# Altium PCB STM_System_Board.PCBDOC (part 11 of 16)
Units mm, origin at the board's own origin, x right, y up, seen from the top; angles counter-clockwise.
Board outline 222.53 x 100.01 mm, 6 copper layers (Top Layer, Int1 (GND), Int2 (Sign), Layer 1, Layer 2, Bottom Layer), stack 1.526 mm thick; 702 components, 774 nets, 3596 pads, 1988 vias.
Unrouted connection lines stored in the file: 1.
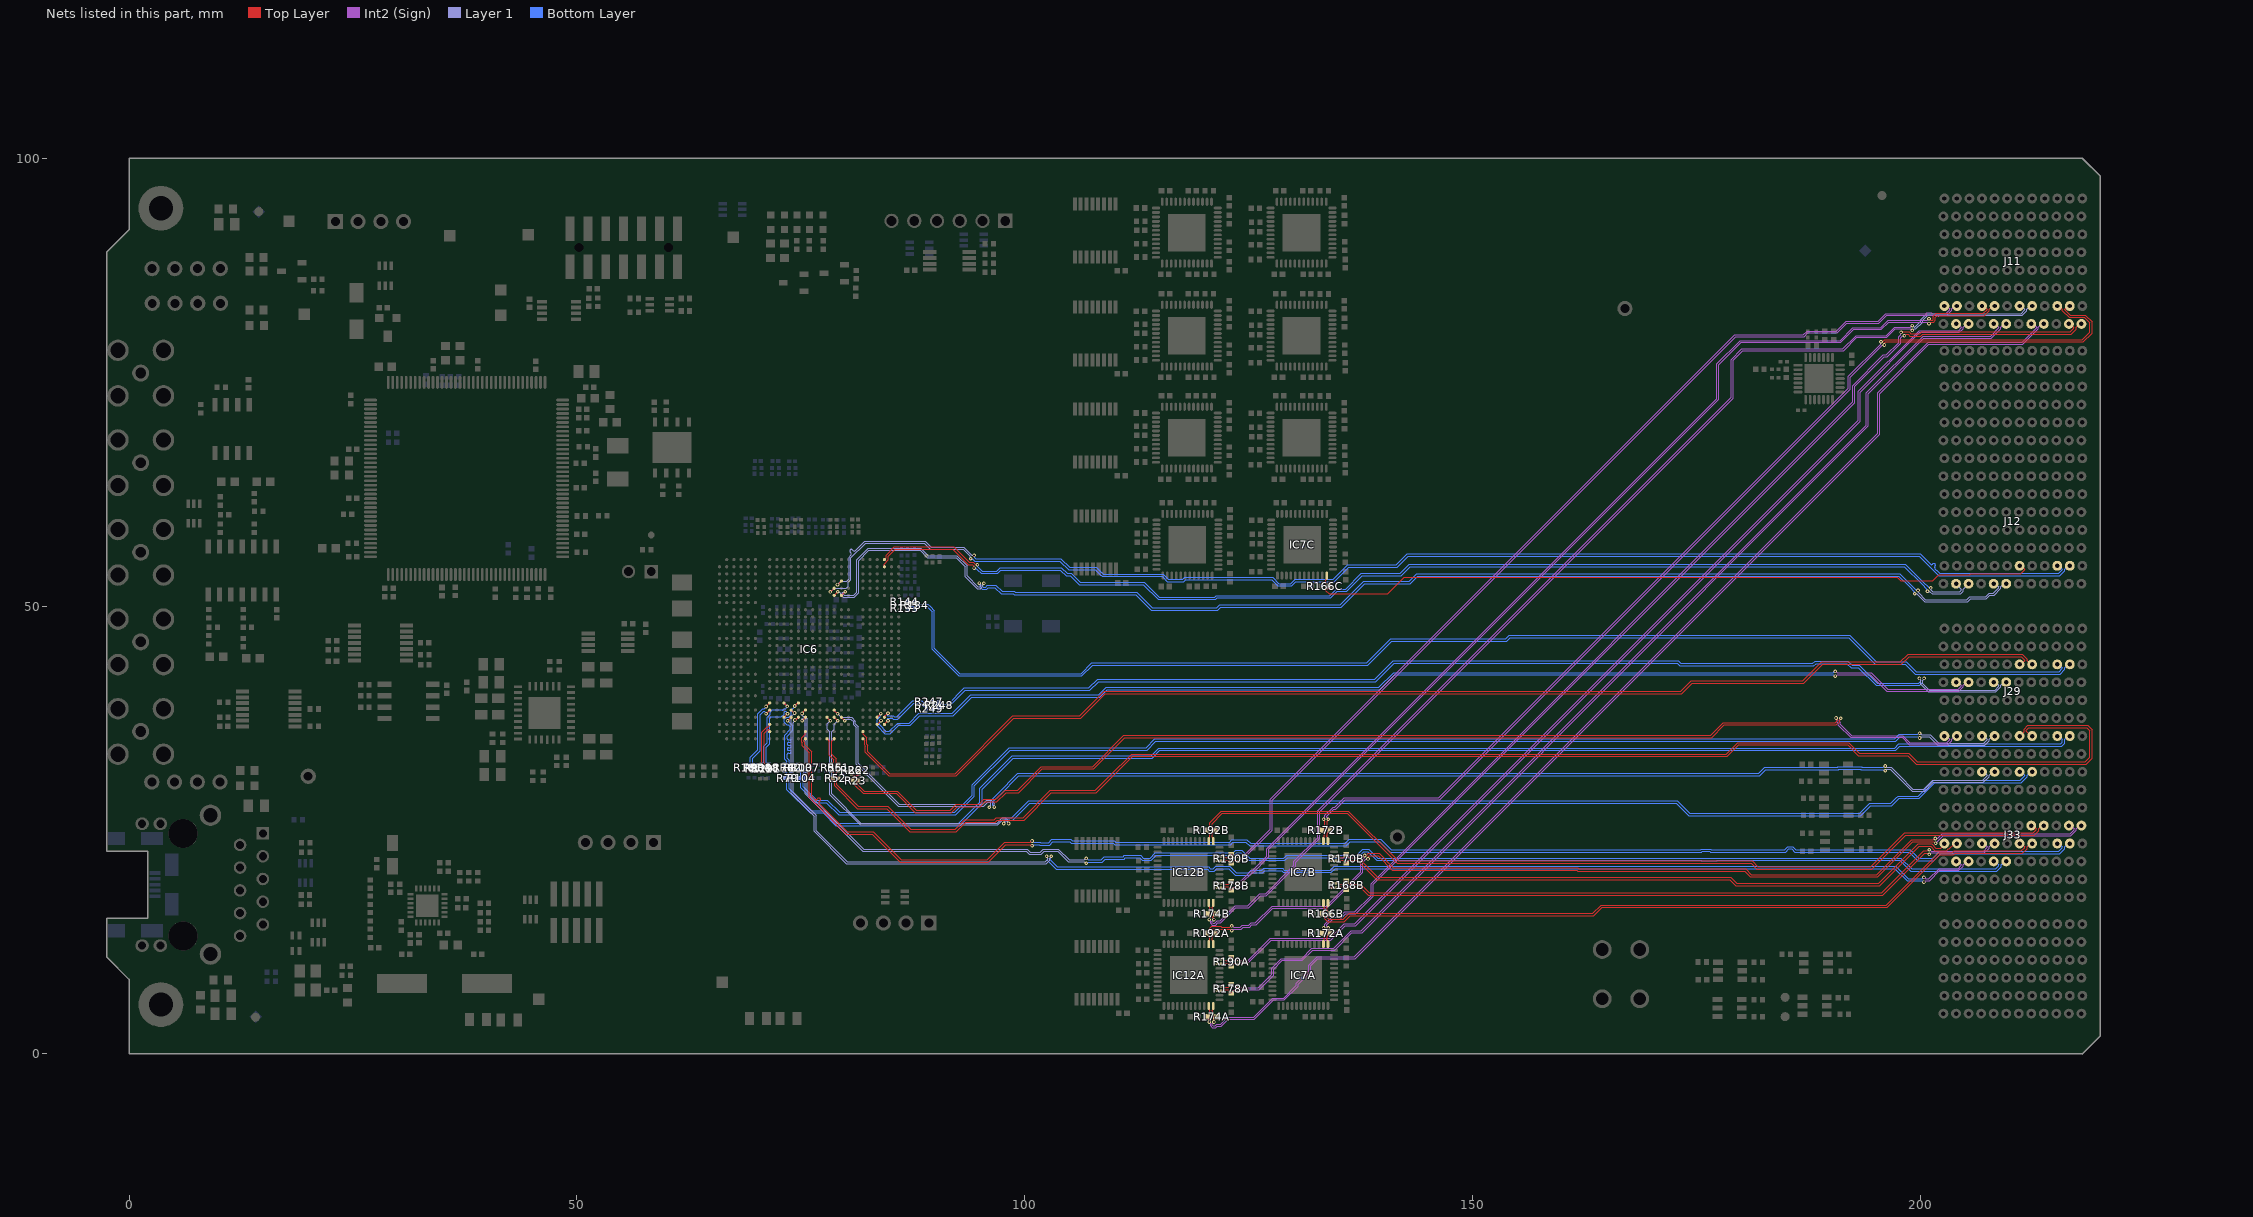
[diagram p14: the nets of this part, all layers, seen from the top]

## Via types
v1: diameter 0.4, hole 0.2, Top Layer to Bottom Layer, tented both sides, 1806 vias
v2: diameter 0.7, hole 0.4, Top Layer to Bottom Layer, tented both sides, 92 vias
v3: diameter 0.7, hole 0.4, Top Layer to Bottom Layer, 90 vias

## Nets (pads, with @x,y where several pads share a name; then routed paths per layer and width w, separated by ;. In a path a pad name is that pad's centre, name@x,y a point inside that pad or via, vN(x,y) a via of type N, cw(c..) or ccw(c..) an arc to the next point about the centre after c; other vN are vias at no path point) (continued)
SLOT1.LVDS_11_N: IC7A.14 J11.B1 R172A.2 | length 117.1
  Top Layer w0.095: IC7A.14@133.325,12.256 133.325,12.598 133.442,12.715 133.442,12.959 133.468,12.986 133.468,13.141 133.412,13.196 133.374,13.196 133.131,13.439 R172A.2@133.131,13.459 133.338,13.665 v1(133.338,14.062) ; v1(197.802,80.548) 197.846,80.592 198.704,80.592 198.899,80.397 199.885,80.397 200.088,80.6 216.673,80.6 217.105,81.032 217.105,81.111 216.726,81.49 J11.B1@216.539,81.49
  Int2 (Sign) w0.102: v1(133.338,14.062) 133.338,14.114 133.495,14.271 133.495,14.493 134.266,15.264 135.1,15.264 135.705,15.869 136.846,15.869 138.65,17.672 138.65,19.014 192.411,72.775 192.411,74.611 195.84,78.04 196.163,78.04 197.538,79.416 197.538,80.062 197.765,80.289 197.765,80.511 v1(197.802,80.548)
SLOT1.LVDS_11_P: IC7A.13 J11.A1 R172A.1 | length 117
  Top Layer w0.095: IC7A.13@133.825,12.256 133.825,12.612 133.708,12.729 133.708,12.849 133.735,12.875 133.735,13.141 133.791,13.196 133.829,13.196 134.071,13.439 R172A.1@134.071,13.459 133.865,13.665 v1(133.865,14.062) ; v1(198.175,80.175) 198.25,80.175 198.4,80.325 198.593,80.325 198.788,80.13 199.995,80.13 200.199,80.333 216.784,80.333 217.372,80.921 217.372,81.111 217.752,81.49 J11.A1@217.939,81.49
  Int2 (Sign) w0.102: v1(133.865,14.062) 133.865,14.114 133.708,14.271 133.708,14.404 134.355,15.05 135.189,15.05 135.793,15.655 136.935,15.655 138.864,17.584 138.864,18.925 192.625,72.686 192.625,74.522 195.929,77.826 196.251,77.826 197.752,79.327 197.752,79.974 197.917,80.138 198.138,80.138 v1(198.175,80.175)
SLOT1.LVDS_12_N: IC12A.48 J11.E1 R174A.2 | length 130.8
  Top Layer w0.095: IC12A.48@121.025,5.356 121.025,5.015 120.908,4.898 120.908,4.769 120.968,4.708 120.968,4.464 121.024,4.408 121.063,4.408 121.305,4.165 R174A.2@121.305,4.145 121.099,3.939 v1(121.099,3.565)
  Int2 (Sign) w0.102: v1(121.099,3.565) 121.099,3.513 120.942,3.357 120.942,3.224 121.002,3.164 121.238,3.164 121.399,3.325 121.85,3.325 122.613,4.088 125.538,4.088 127.693,6.243 128.876,6.243 130.305,7.673 130.305,7.894 131.689,9.278 131.689,9.914 132.627,10.851 136.776,10.851 195.211,69.286 195.211,73.811 200.832,79.432 211.31,79.432 212.932,81.054 212.932,81.138 212.58,81.49 J11.E1@212.339,81.49
SLOT1.LVDS_12_P: IC12A.47 J11.D1 R174A.1 | length 131.5
  Top Layer w0.095: IC12A.47@120.525,5.356 120.525,5.015 120.642,4.898 120.642,4.658 120.702,4.598 120.702,4.464 120.646,4.408 120.608,4.408 120.365,4.165 R174A.1@120.365,4.145 120.572,3.939 v1(120.572,3.565)
  Int2 (Sign) w0.102: v1(120.572,3.565) 120.572,3.513 120.728,3.357 120.728,3.135 120.913,2.95 121.327,2.95 121.488,3.111 121.939,3.111 122.702,3.874 125.627,3.874 127.782,6.03 128.964,6.03 130.519,7.585 130.519,7.805 131.903,9.189 131.903,9.825 132.716,10.637 136.865,10.637 195.425,69.197 195.425,73.722 200.92,79.218 211.398,79.218 213.146,80.965 213.146,81.138 213.498,81.49 J11.D1@213.739,81.49
SLOT1.LVDS_13_N: IC12A.4 J11.H1 R178A.2 | length 121.4
  Top Layer w0.095: IC12A.4@121.725,7.556 122.067,7.556 122.183,7.44 122.428,7.44 122.448,7.42 122.71,7.42 122.766,7.475 122.766,7.514 123.008,7.756 R178A.2@123.028,7.756 123.048,7.756 123.291,7.514 123.291,7.475 123.347,7.42 123.642,7.42 123.772,7.55 v1(123.85,7.55)
  Int2 (Sign) w0.102: v1(123.85,7.55) 123.902,7.55 124.059,7.393 126.068,7.393 127.55,8.875 127.55,9.564 128.638,10.651 130.881,10.651 132.029,11.8 134.475,11.8 136.414,13.739 137.564,13.739 157.644,33.819 157.644,33.894 193.936,70.186 193.936,73.786 200.264,80.114 207.792,80.114 208.732,81.054 208.732,81.138 208.38,81.49 J11.H1@208.139,81.49
SLOT1.LVDS_13_P: IC12A.3 J11.G1 R178A.1 | length 121.8
  Top Layer w0.095: IC12A.3@121.725,7.056 122.067,7.056 122.183,7.173 122.317,7.173 122.338,7.153 122.71,7.153 122.766,7.097 122.766,7.059 123.008,6.816 R178A.1@123.028,6.816 123.048,6.816 123.291,7.059 123.291,7.097 123.347,7.153 123.642,7.153 123.772,7.023 v1(123.85,7.023)
  Int2 (Sign) w0.102: v1(123.85,7.023) 123.902,7.023 124.059,7.179 126.157,7.179 127.764,8.786 127.764,9.475 128.726,10.437 130.969,10.437 132.118,11.586 134.564,11.586 136.503,13.525 137.653,13.525 157.858,33.73 157.858,33.805 194.15,70.097 194.15,73.697 200.353,79.9 207.881,79.9 208.946,80.965 208.946,81.138 209.298,81.49 J11.G1@209.539,81.49
SLOT1.LVDS_14_N: IC12A.10 J11.K1 R190A.2 | length 115.3
  Top Layer w0.095: IC12A.10@121.725,10.556 122.067,10.556 122.183,10.44 122.428,10.44 122.461,10.407 122.71,10.407 122.766,10.463 122.766,10.501 123.008,10.744 R190A.2@123.028,10.744 123.048,10.744 123.291,10.501 123.291,10.463 123.346,10.407 123.617,10.407 123.747,10.537 v1(123.825,10.537)
  Int2 (Sign) w0.102: v1(123.825,10.537) 123.877,10.537 124.034,10.381 124.856,10.381 127.389,12.914 134.039,12.914 135.664,14.539 136.839,14.539 193.025,70.725 193.025,73.95 199.825,80.75 204.228,80.75 204.532,81.054 204.532,81.138 204.18,81.49 J11.K1@203.939,81.49
SLOT1.LVDS_14_P: IC12A.9 J11.J1 R190A.1 | length 115.7
  Top Layer w0.095: IC12A.9@121.725,10.056 122.067,10.056 122.183,10.173 122.317,10.173 122.35,10.14 122.71,10.14 122.766,10.085 122.766,10.046 123.008,9.804 R190A.1@123.028,9.804 123.048,9.804 123.291,10.046 123.291,10.085 123.346,10.14 123.617,10.14 123.747,10.01 v1(123.825,10.01)
  Int2 (Sign) w0.102: v1(123.825,10.01) 123.877,10.01 124.034,10.167 124.944,10.167 127.478,12.7 134.128,12.7 135.753,14.325 136.928,14.325 193.239,70.636 193.239,73.861 199.914,80.536 204.317,80.536 204.746,80.965 204.746,81.138 205.098,81.49 J11.J1@205.339,81.49
SLOT1.LVDS_15_N: IC12A.14 J33.B5 R192A.2 | length 107
  Top Layer w0.095: IC12A.14@120.525,12.256 120.525,12.598 120.642,12.715 120.642,12.959 120.645,12.963 120.645,13.163 120.589,13.218 120.551,13.218 120.308,13.461 R192A.2@120.308,13.481 120.308,13.501 120.551,13.743 120.589,13.743 120.645,13.799 120.645,14.044 120.857,14.256 121.876,14.256 121.968,14.164 122.887,14.164 123.017,14.294 v1(123.1,14.294) ; v1(137.927,22.148) 137.983,22.203 138.167,22.203 138.34,22.376 139.535,22.376 141.119,20.792 161.708,20.792 161.833,20.667 180.45,20.667 181.092,20.025 195.075,20.025 198.982,23.932 201.424,23.932 201.542,24.051 v1(201.625,24.051)
  Int2 (Sign) w0.102: v1(123.1,14.294) 123.152,14.294 123.309,14.137 124.051,14.137 124.281,14.367 124.992,14.367 125.25,14.625 125.722,14.625 127.597,16.5 133.622,16.5 137.475,20.353 137.475,21.474 137.89,21.889 137.89,22.111 v1(137.927,22.148) ; v1(201.625,24.051) 201.651,24.077 201.894,24.077 202.406,24.589 216.667,24.589 217.132,25.054 217.132,25.138 216.78,25.49 J33.B5@216.539,25.49
SLOT1.LVDS_15_P: IC12A.13 J33.A5 R192A.1 | length 107
  Top Layer w0.095: IC12A.13@121.025,12.256 121.025,12.598 120.908,12.715 120.908,12.849 120.912,12.852 120.912,13.163 120.968,13.218 121.006,13.218 121.248,13.461 R192A.1@121.248,13.481 121.248,13.501 121.006,13.743 120.968,13.743 120.912,13.799 120.912,13.933 120.968,13.989 121.765,13.989 121.857,13.897 122.887,13.897 123.017,13.767 v1(123.1,13.767) ; v1(138.3,21.775) 138.355,21.83 138.355,22.014 138.45,22.109 139.425,22.109 141.009,20.525 161.598,20.525 161.723,20.4 180.339,20.4 180.981,19.758 195.186,19.758 199.093,23.665 201.444,23.665 201.585,23.525 v1(201.664,23.525)
  Int2 (Sign) w0.102: v1(123.1,13.767) 123.152,13.767 123.309,13.923 124.14,13.923 124.369,14.153 125.08,14.153 125.339,14.411 125.811,14.411 127.686,16.286 133.711,16.286 137.689,20.264 137.689,21.385 138.042,21.738 138.263,21.738 v1(138.3,21.775) ; v1(201.664,23.525) 201.664,23.544 202.495,24.375 216.756,24.375 217.346,24.965 217.346,25.138 217.698,25.49 J33.A5@217.939,25.49
SLOT1.LVDSr0_N: IC6.W21 R101.1 | length 8
  Top Layer w0.095: v1(71.115,38.784) IC6.W21@71.515,39.184
  Bottom Layer w0.095: R101.1@69.099,32.269 69.099,32.289 69.261,32.451 69.291,32.451 69.346,32.507 69.346,33.117 70.196,33.967 70.196,37.972 70.741,38.517 70.931,38.517 71.115,38.702 v1(71.115,38.784)
SLOT1.LVDSr0_P: IC6.W22 R90.1 | length 7.6
  Top Layer w0.095: v1(71.115,37.984) IC6.W22@71.515,38.384
  Bottom Layer w0.095: R90.1@69.861,32.269 69.861,32.289 69.698,32.451 69.669,32.451 69.613,32.507 69.613,33.007 70.463,33.856 70.463,37.862 70.852,38.251 70.931,38.251 71.115,38.066 v1(71.115,37.984)
SLOT1.LVDSr1_N: IC6.W24 R129.1 | length 5.2
  Top Layer w0.095: R129.1@70.387,32.192 70.387,32.212 70.55,32.375 70.579,32.375 70.635,32.43 70.635,35.93 71.222,36.517 71.411,36.517 71.467,36.573 71.467,36.736 IC6.W24@71.515,36.784
SLOT1.LVDSr1_P: IC6.W25 R121.1 | length 4.7
  Top Layer w0.095: R121.1@71.149,32.192 71.149,32.212 70.987,32.375 70.957,32.375 70.902,32.43 70.902,35.82 71.333,36.251 71.411,36.251 71.467,36.195 71.467,36.032 IC6.W25@71.515,35.984
SLOT1.LVDSr3_N: IC6.U23 R88.1 | length 8.7
  Top Layer w0.095: IC6.U23@73.115,37.59 v1(73.5,37.975)
  Bottom Layer w0.095: R88.1@71.389,32.279 71.389,32.299 71.227,32.461 71.183,32.461 71.127,32.517 71.127,34.226 71.535,34.633 71.535,37.253 71.535,37.497 71.68,37.642 71.759,37.642 71.786,37.615 72.82,37.615 73.116,37.912 73.116,38.138 73.232,38.254 73.311,38.254 73.367,38.198 73.367,38.191 73.5,38.058 v1(73.5,37.975)
SLOT1.LVDSr3_P: IC6.U21 R84.1 | length 9.1
  Top Layer w0.095: IC6.U21@73.115,39.184 73.115,39.16 v1(73.475,38.8)
  Bottom Layer w0.095: R84.1@70.596,32.285 70.596,32.305 70.759,32.467 70.805,32.467 70.861,32.523 70.861,34.336 71.268,34.743 71.268,37.364 71.268,37.607 71.566,37.906 71.566,38.145 71.821,38.399 72.855,38.399 72.888,38.366 72.967,38.366 73.122,38.521 73.311,38.521 73.385,38.595 73.385,38.628 73.475,38.717 v1(73.475,38.8)
SLOT2.LVDS_0_N: J29.C2 R79.1 R82.2 | length 151.7
  Bottom Layer w0.095: R79.1@73.88,30.795 R79.1@73.86,30.795 ; R82.2@73.94,31.597 73.94,31.577 73.778,31.415 73.739,31.415 73.683,31.359 73.683,31.013 73.697,30.999 73.697,30.958 R79.1@73.86,30.795 ; J29.C2@215.239,35.49 215.426,35.49 215.805,35.111 215.805,34.78 215.65,34.625 197.573,34.625 197.089,34.142 114.967,34.142 114.117,33.292 98.565,33.292 94.95,29.677 94.95,28.092 92.608,25.75 79.002,25.75 77.577,27.175 76.125,27.175 73.683,29.617 73.683,30.577 73.697,30.591 73.697,30.633 R79.1@73.86,30.795
SLOT2.LVDS_0_P: J29.B2 R74.2 R79.2 | length 152.6
  Bottom Layer w0.095: R74.2@73.153,31.622 73.153,31.602 73.315,31.44 73.352,31.44 73.416,31.376 73.416,31.013 73.402,30.999 73.402,30.958 R79.2@73.24,30.795 ; R79.2@73.22,30.795 R79.2@73.24,30.795 ; J29.B2@216.639,35.49 216.452,35.49 216.072,35.111 216.072,34.67 215.761,34.358 197.683,34.358 197.2,33.875 115.077,33.875 114.227,33.025 98.675,33.025 95.217,29.567 95.217,27.981 92.719,25.483 78.892,25.483 77.467,26.908 76.014,26.908 73.416,29.507 73.416,30.577 73.402,30.591 73.402,30.633 R79.2@73.24,30.795
SLOT2.LVDS_1_N: J29.F2 R52.1 R56.2 | length 162
  Top Layer w0.095: R56.2@78.423,31.624 78.423,31.604 78.585,31.442 78.628,31.442 78.683,31.386 78.683,31.087 78.703,31.068 78.703,30.922 R52.1@78.552,30.771 78.572,30.771 78.735,30.608 78.735,30.567 78.749,30.553 78.749,29.949 81.314,27.383 84.589,27.383 87.164,24.808 92.336,24.808 93.393,25.866 96.691,25.866 96.933,26.108 99.908,26.108 102.958,29.158 107.966,29.158 112.016,33.208 178.408,33.208 179.697,34.497 191.851,34.497 193.048,33.3 198.525,33.3 199.492,32.333 218.486,32.333 219.142,32.989 219.142,36.186 218.66,36.667 211.933,36.667 211.535,36.269 211.535,35.978 211.271,35.714 211.271,35.49 J29.F2@211.039,35.49
SLOT2.LVDS_1_P: J29.E2 R51.2 R52.2 | length 160.2
  Top Layer w0.095: R51.2@79.21,31.624 79.21,31.604 79.048,31.442 79.006,31.442 78.95,31.386 78.95,31.198 78.97,31.178 78.97,30.993 R52.2@79.192,30.771 ; R52.2@79.212,30.771 R52.2@79.192,30.771 ; J29.E2@212.439,35.49 212.36,35.49 211.802,36.048 211.802,36.158 212.043,36.4 218.55,36.4 218.875,36.075 218.875,33.1 218.375,32.6 199.602,32.6 198.636,33.567 193.158,33.567 191.961,34.764 179.586,34.764 178.298,33.475 111.906,33.475 109.465,31.035 107.856,29.425 102.848,29.425 99.798,26.375 96.823,26.375 96.581,26.133 93.283,26.133 92.225,25.075 87.275,25.075 84.7,27.65 81.425,27.65 79.016,30.059 79.016,30.553 79.03,30.567 79.03,30.608 R52.2@79.192,30.771
SLOT2.LVDS_2_N: IC6.L23 J33.F8 | length 149
  Top Layer w0.095: IC6.L23@77.89,37.584 v1(78.29,37.184)
  Layer 1 w0.102: v1(78.29,37.184) 77.937,36.831 77.937,36.228 78.158,36.006 78.165,36.006 78.225,35.947 78.225,35.596 78.225,28.947 81.611,25.561 96.988,25.561 97.553,26.126 97.747,26.126 97.807,26.067 97.807,25.934 97.65,25.777 v1(97.65,25.725)
  Bottom Layer w0.095: v1(97.65,25.725) 97.65,25.803 97.78,25.933 97.78,26.178 97.992,26.39 98.342,26.39 98.362,26.371 98.536,26.371 100.416,28.25 172.8,28.25 174.2,26.85 193.173,26.85 194.323,28 196.675,28 197.25,28.575 197.268,28.575 197.484,28.791 199.739,28.791 201.473,30.525 211.098,30.525 211.605,31.032 211.605,31.111 211.226,31.49 J33.F8@211.039,31.49
SLOT2.LVDS_2_P: IC6.K23 J33.E8 | length 149.1
  Top Layer w0.095: IC6.K23@78.715,37.584 v1(79.115,37.184)
  Layer 1 w0.102: v1(79.115,37.184) 78.737,36.806 78.737,36.272 78.439,35.974 78.439,35.685 78.439,29.036 81.7,25.775 96.899,25.775 97.464,26.34 97.836,26.34 98.02,26.155 98.02,25.934 98.177,25.777 v1(98.177,25.725)
  Bottom Layer w0.095: v1(98.177,25.725) 98.177,25.803 98.047,25.933 98.047,26.068 98.103,26.123 98.232,26.123 98.251,26.104 98.647,26.104 100.526,27.983 172.689,27.983 174.089,26.583 193.283,26.583 194.433,27.733 196.786,27.733 197.361,28.308 197.379,28.308 197.595,28.524 199.85,28.524 201.583,30.258 211.209,30.258 211.872,30.921 211.872,31.111 212.252,31.49 J33.E8@212.439,31.49
SLOT2.LVDS_3_N: J29.H5 R248.1 R249.2 | length 125.2
  Layer 1 w0.102: v1(200.375,41.925) 200.375,41.873 200.218,41.716 200.218,41.332 200.925,40.625 208.303,40.625 208.732,41.054 208.732,41.138 208.38,41.49 J29.H5@208.139,41.49
  Bottom Layer w0.095: R249.2@89.678,38.529 89.698,38.529 89.861,38.691 89.861,38.726 89.916,38.781 90.207,38.781 90.211,38.777 90.262,38.777 R248.1@90.425,38.615 ; R248.1@90.425,38.595 R248.1@90.425,38.615 ; v1(200.375,41.925) 200.375,41.847 200.245,41.717 200.245,41.472 199.906,41.133 195.014,41.133 193.039,43.108 192.242,43.108 191.767,43.583 188.311,43.583 188.052,43.325 173.087,43.325 172.804,43.608 141.208,43.608 139.175,41.575 108.252,41.575 107.261,40.583 93.354,40.583 91.563,38.792 90.643,38.792 90.629,38.777 90.587,38.777 R248.1@90.425,38.615
SLOT2.LVDS_3_P: J29.G5 R247.2 R248.2 | length 125.5
  Layer 1 w0.102: v1(199.848,41.925) 199.848,41.873 200.005,41.716 200.005,41.243 200.836,40.411 208.392,40.411 208.946,40.965 208.946,41.138 209.298,41.49 J29.G5@209.539,41.49
  Bottom Layer w0.095: R247.2@89.678,39.301 89.698,39.301 89.861,39.138 89.861,39.104 89.916,39.048 90.197,39.048 90.221,39.072 90.262,39.072 R248.2@90.425,39.235 ; R248.2@90.425,39.255 R248.2@90.425,39.235 ; v1(199.848,41.925) 199.848,41.847 199.978,41.717 199.978,41.583 199.796,41.4 195.125,41.4 193.15,43.375 192.352,43.375 191.877,43.85 188.2,43.85 187.942,43.592 173.198,43.592 172.914,43.875 141.098,43.875 139.064,41.842 108.142,41.842 107.15,40.85 93.244,40.85 91.452,39.058 90.643,39.058 90.629,39.072 90.587,39.072 R248.2@90.425,39.235
SLOT2.LVDS_4_N: IC6.D24 J29.K5 | length 126.8
  Top Layer w0.095: IC6.D24@83.515,36.784 83.515,36.789 v1(83.941,37.215)
  Int2 (Sign) w0.102: v1(190.45,42.707) 190.502,42.707 190.659,42.55 194.45,42.55 194.912,42.088 196.3,40.7 204.178,40.7 204.532,41.054 204.532,41.138 204.18,41.49 J29.K5@203.939,41.49
  Bottom Layer w0.095: v1(83.941,37.215) 83.941,37.167 83.781,37.007 83.781,36.727 84.482,36.026 84.88,36.026 85.796,36.942 87.092,36.942 88.167,38.017 91.892,38.017 93.95,40.075 108.223,40.075 109.064,40.917 139.489,40.917 141.149,42.576 190.242,42.576 190.372,42.707 v1(190.45,42.707)
SLOT2.LVDS_4_P: IC6.D23 J29.J5 | length 128.4
  Top Layer w0.095: IC6.D23@83.515,37.584 83.515,37.589 v1(83.916,37.99) v1@83.916,37.985
  Int2 (Sign) w0.102: v1(190.45,42.18) 190.502,42.18 190.659,42.336 194.361,42.336 194.824,41.874 196.211,40.486 204.267,40.486 204.746,40.965 204.746,41.138 205.098,41.49 J29.J5@205.339,41.49
  Bottom Layer w0.095: v1(83.916,37.99) 83.858,37.932 83.858,37.661 83.514,37.318 83.514,36.616 84.372,35.759 84.991,35.759 85.907,36.675 87.202,36.675 88.277,37.75 92.002,37.75 94.061,39.808 108.333,39.808 109.175,40.65 139.6,40.65 141.26,42.31 190.242,42.31 190.372,42.18 v1(190.45,42.18)
SLOT2.LVDS_5_N: IC6.P22 J33.H3 | length 149.6
  Top Layer w0.095: v1(75.125,38) 75.125,38.01 IC6.P22@75.51,38.395
  Layer 1 w0.102: v1(75.125,38) 75.174,37.951 75.174,37.779 75.234,37.719 75.406,37.719 75.707,37.419 75.707,29.143 81.986,22.864 100.239,22.864 100.576,22.526 101.726,22.526 102.064,22.864 103.736,22.864 104.934,21.666 106.641,21.666 106.798,21.822 v1(106.85,21.822)
  Bottom Layer w0.095: v1(106.85,21.822) 106.928,21.822 107.058,21.692 108.54,21.692 108.874,22.026 110.971,22.026 111.112,22.166 112.915,22.166 113.212,21.869 113.995,21.869 114.558,22.432 123.235,22.432 123.554,22.751 124.205,22.751 125.087,21.87 128.893,21.87 129.215,22.192 137.064,22.192 137.714,22.842 138.408,22.842 139.383,21.867 139.925,21.867 175.597,21.867 175.613,21.85 175.923,21.85 175.939,21.867 197.783,21.867 198.975,20.675 208.348,20.675 208.705,21.032 208.705,21.111 208.326,21.49 J33.H3@208.139,21.49
SLOT2.LVDS_5_P: IC6.P23 J33.G3 | length 150
  Top Layer w0.095: v1(75.125,37.2) 75.128,37.2 75.516,37.588 IC6.P23@75.516,37.591
  Layer 1 w0.102: v1(75.125,37.2) 75.174,37.249 75.174,37.446 75.234,37.506 75.318,37.506 75.493,37.331 75.493,29.055 81.897,22.65 100.15,22.65 100.488,22.312 101.815,22.312 102.153,22.65 103.647,22.65 104.846,21.452 106.641,21.452 106.798,21.295 v1(106.85,21.295)
  Bottom Layer w0.095: v1(106.85,21.295) 106.928,21.295 107.058,21.425 108.651,21.425 108.984,21.759 111.082,21.759 111.223,21.9 112.804,21.9 113.101,21.602 114.106,21.602 114.669,22.166 123.345,22.166 123.665,22.485 124.095,22.485 124.977,21.603 129.003,21.603 129.326,21.925 137.175,21.925 137.825,22.575 138.298,22.575 139.273,21.6 139.925,21.6 175.486,21.6 175.502,21.584 177.284,21.584 177.3,21.6 197.673,21.6 198.865,20.408 208.459,20.408 208.972,20.921 208.972,21.111 209.352,21.49 J33.G3@209.539,21.49
SLOT2.LVDS_6_N: IC6.T22 J33.K3 | length 149.1
  Top Layer w0.095: IC6.T22@73.915,38.384 73.938,38.384 74.266,38.056 v1(74.29,38.056)
  Int2 (Sign) w0.102: v1(200.35,19.707) 200.431,19.707 200.587,19.55 200.897,19.55 202.047,20.7 204.178,20.7 204.532,21.054 204.532,21.138 204.18,21.49 J33.K3@203.939,21.49
  Layer 1 w0.102: v1(74.29,38.056) 73.907,37.673 73.907,29.118 76.486,26.539 76.486,24.836 80.086,21.236 102.385,21.236 102.793,21.645 102.793,21.866 102.95,22.023 v1(102.95,22.075)
  Bottom Layer w0.095: v1(102.95,22.075) 102.95,21.997 102.82,21.867 102.82,21.68 103.625,20.875 120.503,20.875 120.699,20.679 121.009,20.679 121.292,20.962 122.854,20.962 123.616,20.2 124.967,20.2 125.282,20.515 125.997,20.515 126.01,20.503 126.459,20.503 126.673,20.717 128.767,20.717 128.959,20.525 134.098,20.525 134.539,20.967 140.075,20.967 197.208,20.967 198.599,19.576 200.142,19.576 200.272,19.707 v1(200.35,19.707)
SLOT2.LVDS_6_P: IC6.R23 J33.J3 | length 148.3
  Top Layer w0.095: v1(74.325,37.275) 74.365,37.275 74.676,37.585 IC6.R23@74.709,37.585
  Int2 (Sign) w0.102: v1(200.35,19.18) 200.431,19.18 200.587,19.336 200.986,19.336 202.136,20.486 204.267,20.486 204.746,20.965 204.746,21.138 205.098,21.49 J33.J3@205.339,21.49
  Layer 1 w0.102: v1(74.325,37.275) 74.325,37.194 74.121,36.991 74.121,29.206 76.7,26.628 76.7,24.925 80.175,21.45 102.296,21.45 102.58,21.733 102.58,21.866 102.423,22.023 v1(102.423,22.075)
  Bottom Layer w0.095: v1(102.423,22.075) 102.423,21.997 102.553,21.867 102.553,21.57 103.514,20.608 120.393,20.608 120.589,20.413 121.12,20.413 121.403,20.695 122.743,20.695 123.505,19.933 125.077,19.933 125.392,20.248 125.887,20.248 125.899,20.236 126.569,20.236 126.783,20.45 128.656,20.45 128.848,20.258 134.208,20.258 134.65,20.7 140.075,20.7 197.098,20.7 198.488,19.31 200.142,19.31 200.272,19.18 v1(200.35,19.18)
SLOT2.LVDS_7_N: IC6.P26 J33.C4 | length 154.3
  Top Layer w0.095: IC6.P26@75.515,35.184 75.331,35.001 75.331,34.919 75.4,34.85 75.4,34.525 76.214,33.711 76.214,28.761 76.35,28.625 76.384,28.591 76.551,28.424 ccw(c76.674,28.547) 76.798,28.424 76.893,28.519 cw(c77.016,28.396) 77.14,28.519 cw(c77.016,28.396) 77.14,28.272 77.045,28.177 ccw(c77.168,28.054) 77.045,27.93 77.291,27.684 77.325,27.65 80.158,24.817 83.058,24.817 86.2,21.675 95.808,21.675 97.771,23.639 100.592,23.639 100.722,23.769 v1(100.8,23.769)
  Bottom Layer w0.095: v1(100.8,23.769) 100.878,23.769 101.008,23.639 101.725,23.639 101.788,23.576 102.648,23.576 103.014,23.941 105.138,23.941 105.279,23.8 109.992,23.8 110.15,23.642 122.842,23.642 123.117,23.917 124.782,23.917 125.2,23.498 135.748,23.498 136.198,23.948 136.729,23.948 136.735,23.942 139.733,23.942 140.883,22.792 141.725,22.792 175.428,22.792 175.502,22.866 176.535,22.866 176.609,22.792 184.81,22.792 185.169,23.15 185.7,23.15 186.058,22.792 198.808,22.792 199.775,21.825 201.348,21.825 202.148,22.625 215.398,22.625 215.805,23.032 215.805,23.111 215.426,23.49 J33.C4@215.239,23.49
SLOT2.LVDS_7_P: IC6.P25 J33.B4 | length 155.4
  Top Layer w0.095: IC6.P25@75.515,35.984 75.467,35.936 75.467,35.676 75.064,35.274 75.064,34.808 75.133,34.739 75.133,34.414 75.947,33.601 75.947,28.651 80.048,24.55 82.948,24.55 86.089,21.408 95.918,21.408 97.882,23.372 100.592,23.372 100.722,23.242 v1(100.8,23.242)
  Bottom Layer w0.095: v1(100.8,23.242) 100.878,23.242 101.008,23.372 101.614,23.372 101.678,23.309 102.759,23.309 103.125,23.674 105.027,23.674 105.169,23.533 109.881,23.533 110.039,23.375 122.952,23.375 123.227,23.65 124.671,23.65 125.09,23.231 135.858,23.231 136.308,23.681 136.618,23.681 136.624,23.675 139.623,23.675 140.773,22.525 141.725,22.525 175.538,22.525 175.613,22.6 176.424,22.6 176.499,22.525 184.921,22.525 185.279,22.883 185.59,22.883 185.948,22.525 198.698,22.525 199.664,21.558 201.458,21.558 202.258,22.358 215.509,22.358 216.072,22.921 216.072,23.111 216.452,23.49 J33.B4@216.639,23.49
SLOT2.LVDS_8_N: IC7B.48 J33.F4 R166B.2 | length 84.1
  Top Layer w0.095: IC7B.48@133.825,16.856 133.825,16.515 133.708,16.398 133.708,16.228 133.732,16.204 133.732,15.959 133.788,15.904 133.827,15.904 134.069,15.661 R166B.2@134.069,15.641 134.069,15.621 133.827,15.379 133.788,15.379 133.732,15.323 133.732,15.189 133.913,15.008 135.515,15.008 136.206,15.7 163.4,15.7 164.325,16.625 196.15,16.625 202.006,22.481 203.531,22.481 203.717,22.667 211.24,22.667 211.605,23.032 211.605,23.111 211.226,23.49 J33.F4@211.039,23.49
SLOT2.LVDS_8_P: IC7B.47 J33.E4 R166B.1 | length 85.1
  Top Layer w0.095: R166B.1@133.129,15.641 133.129,15.621 R166B.1@133.302,15.448 ; IC7B.47@133.325,16.856 133.325,16.515 133.442,16.398 133.442,16.118 133.466,16.094 133.466,15.959 133.41,15.904 133.372,15.904 133.302,15.835 R166B.1@133.302,15.448 ; J33.E4@212.439,23.49 212.252,23.49 211.872,23.111 211.872,22.921 211.351,22.4 203.827,22.4 203.642,22.214 202.117,22.214 196.261,16.358 164.436,16.358 163.511,15.433 136.317,15.433 135.625,14.742 133.802,14.742 133.466,15.078 133.466,15.323 133.41,15.379 133.372,15.379 R166B.1@133.302,15.448
SLOT2.LVDS_9_N: IC7B.4 J33.I4 R168B.2 | length 76.7
  Top Layer w0.095: IC7B.4@134.525,19.056 134.867,19.056 134.983,18.94 135.222,18.94 135.226,18.944 135.559,18.944 135.615,19 135.615,19.038 135.857,19.281 R168B.2@135.877,19.281 135.897,19.281 136.14,19.038 136.14,19 136.195,18.944 137.481,18.944 137.76,18.665 138.45,17.975 195.625,17.975 200.322,22.672 200.742,22.672 200.872,22.802 v1(200.95,22.802)
  Int2 (Sign) w0.102: v1(200.95,22.802) 201.002,22.802 201.159,22.645 207.024,22.645 207.432,23.054 207.432,23.138 207.08,23.49 J33.I4@206.839,23.49
SLOT2.LVDS_9_P: IC7B.3 J33.H4 R168B.1 | length 77.1
  Top Layer w0.095: IC7B.3@134.525,18.556 134.867,18.556 134.983,18.673 135.332,18.673 135.337,18.677 135.559,18.677 135.615,18.622 135.615,18.583 135.857,18.341 R168B.1@135.877,18.341 135.897,18.341 136.14,18.583 136.14,18.622 136.195,18.677 137.37,18.677 137.493,18.555 138.339,17.708 195.736,17.708 200.432,22.405 200.742,22.405 200.872,22.275 v1(200.95,22.275)
  Int2 (Sign) w0.102: v1(200.95,22.275) 201.002,22.275 201.159,22.432 207.112,22.432 207.646,22.965 207.646,23.138 207.998,23.49 J33.H4@208.239,23.49
SLOT2.LVDS_10_N: IC7B.10 J33.L4 R170B.2 | length 72
  Top Layer w0.095: IC7B.10@134.525,22.056 134.867,22.056 134.983,21.94 135.228,21.94 135.26,21.908 135.554,21.908 135.609,21.963 135.609,22.002 135.852,22.244 R170B.2@135.872,22.244 135.892,22.244 136.134,22.002 136.134,21.963 136.19,21.908 137.217,21.908 139.4,19.725 178.8,19.725 179.475,19.05 195.325,19.05 199.718,23.443 201.216,23.443 201.689,22.97 202.258,22.97 202.639,23.351 J33.L4@202.639,23.49
SLOT2.LVDS_10_P: IC7B.9 J33.K4 R170B.1 | length 73.4
  Top Layer w0.095: IC7B.9@134.525,21.556 134.867,21.556 134.983,21.673 135.118,21.673 135.15,21.641 135.554,21.641 135.609,21.585 135.609,21.547 135.852,21.304 R170B.1@135.872,21.304 135.892,21.304 136.134,21.547 136.134,21.585 136.19,21.641 137.107,21.641 139.29,19.458 178.689,19.458 179.364,18.783 195.436,18.783 199.829,23.177 201.105,23.177 201.578,22.703 202.877,22.703 203.062,22.889 203.205,22.889 203.806,23.49 J33.K4@204.039,23.49
SLOT2.LVDS_11_N: IC7B.14 J11.C2 R172B.2 | length 117.5
  Top Layer w0.095: IC7B.14@133.325,23.756 133.325,24.098 133.442,24.215 133.442,24.459 133.468,24.486 133.468,24.641 133.412,24.696 133.374,24.696 133.131,24.939 R172B.2@133.131,24.959 133.131,24.979 133.374,25.221 133.412,25.221 133.468,25.277 133.468,25.992 133.338,26.122 v1(133.338,26.2) ; v1(195.569,79.506) 195.577,79.514 195.761,79.514 195.998,79.75 218.05,79.75 218.858,80.558 218.858,81.595 218.234,82.219 216.553,82.219 215.805,82.967 215.805,83.156 215.471,83.49 J11.C2@215.239,83.49
  Int2 (Sign) w0.102: v1(133.338,26.2) 133.338,26.252 133.495,26.409 133.495,26.63 134.404,27.54 134.601,27.54 135.661,28.6 146.211,28.6 191.911,74.3 191.911,75.626 195.532,79.247 195.532,79.469 v1(195.569,79.506)
SLOT2.LVDS_11_P: IC7B.13 J11.B2 R172B.1 | length 117.6
  Top Layer w0.095: IC7B.13@133.825,23.756 133.825,24.112 133.708,24.229 133.708,24.349 133.735,24.375 133.735,24.641 133.791,24.696 133.829,24.696 134.071,24.939 R172B.1@134.071,24.959 134.071,24.979 133.829,25.221 133.791,25.221 133.735,25.277 133.735,25.992 133.865,26.122 v1(133.865,26.2) ; v1(195.942,79.133) 195.95,79.141 195.95,79.325 196.108,79.483 218.161,79.483 219.125,80.448 219.125,81.706 218.345,82.486 216.664,82.486 216.072,83.077 216.072,83.156 216.406,83.49 J11.B2@216.639,83.49
  Int2 (Sign) w0.102: v1(133.865,26.2) 133.865,26.252 133.708,26.409 133.708,26.542 134.493,27.326 134.69,27.326 135.75,28.386 146.3,28.386 192.125,74.211 192.125,75.537 195.684,79.096 195.905,79.096 v1(195.942,79.133)
SLOT2.LVDS_12_N: IC12B.48 J11.F2 R174B.2 | length 127.3
  Top Layer w0.095: IC12B.48@121.025,16.856 121.025,16.515 120.908,16.398 120.908,16.269 120.968,16.208 120.968,15.964 121.024,15.908 121.063,15.908 121.305,15.665 R174B.2@121.305,15.645 121.305,15.625 121.063,15.383 121.024,15.383 120.968,15.327 120.968,15.193 121.099,15.063 v1(121.099,15)
  Int2 (Sign) w0.102: v1(121.099,15) 121.099,14.948 120.942,14.791 120.942,14.658 121.002,14.599 121.196,14.599 121.448,14.851 121.786,14.851 123.457,16.523 124.873,16.523 126.24,17.89 126.864,17.89 130.011,21.037 130.011,21.486 132.675,24.15 132.675,27.128 178.85,73.303 178.85,77.503 180.047,78.7 191.297,78.7 192.786,80.189 196.136,80.189 197.088,81.141 198.841,81.141 199.002,81.302 v1(199.05,81.302)
  Layer 1 w0.102: v1(199.05,81.302) 199.102,81.302 199.259,81.145 199.358,81.145 199.992,81.779 199.992,81.962 200.68,82.65 202.5,82.65 211.228,82.65 211.632,83.054 211.632,83.138 211.28,83.49 J11.F2@211.039,83.49
SLOT2.LVDS_12_P: IC12B.47 J11.E2 R174B.1 | length 128.7
  Top Layer w0.095: IC12B.47@120.525,16.856 120.525,16.515 120.642,16.398 120.642,16.158 120.702,16.098 120.702,15.964 120.646,15.908 120.608,15.908 120.365,15.665 R174B.1@120.365,15.645 120.365,15.625 120.608,15.383 120.646,15.383 120.702,15.327 120.702,15.193 120.572,15.063 v1(120.572,15)
  Int2 (Sign) w0.102: v1(120.572,15) 120.572,14.948 120.728,14.791 120.728,14.57 120.913,14.385 121.284,14.385 121.537,14.637 121.874,14.637 123.546,16.309 124.961,16.309 126.329,17.676 126.953,17.676 130.225,20.948 130.225,21.397 132.889,24.061 132.889,27.039 179.064,73.214 179.064,77.414 180.136,78.486 191.386,78.486 192.875,79.975 196.225,79.975 197.177,80.927 198.845,80.927 199.001,80.771 v1(199.054,80.771)
  Layer 1 w0.102: v1(199.054,80.771) 199.102,80.771 199.262,80.932 199.447,80.932 200.205,81.69 200.205,81.873 200.769,82.436 202.588,82.436 ; 201.975,82.374 202.001,82.374 202.064,82.436 202.589,82.436 211.317,82.436 211.846,82.965 211.846,83.138 212.198,83.49 J11.E2@212.439,83.49
SLOT2.LVDS_13_N: IC12B.4 J11.I2 R178B.2 | length 116.9
  Top Layer w0.095: IC12B.4@121.725,19.056 122.067,19.056 122.183,18.94 122.428,18.94 122.448,18.92 122.71,18.92 122.766,18.975 122.766,19.014 123.008,19.256 R178B.2@123.028,19.256 123.048,19.256 123.291,19.014 123.291,18.975 123.347,18.92 123.517,18.92 123.647,19.05 v1(123.725,19.05) ; v1(200.925,82.058) 201.003,82.058 201.133,81.928 201.325,81.928 201.38,81.984 201.38,82.341 201.714,82.675 207.003,82.675 207.405,83.077 207.405,83.156 207.071,83.49 J11.I2@206.839,83.49
  Int2 (Sign) w0.102: v1(123.725,19.05) 123.777,19.05 123.934,18.893 124.067,18.893 124.126,18.953 124.126,19.324 125.268,20.466 125.396,20.466 127.018,22.088 127.018,22.932 177.25,73.164 177.25,77.028 179.861,79.639 190.989,79.639 192.439,81.089 195.523,81.089 196.348,81.914 196.525,81.914 200.144,81.914 200.156,81.902 200.716,81.902 200.873,82.058 v1(200.925,82.058)
SLOT2.LVDS_13_P: IC12B.3 J11.H2 R178B.1 | length 117.3
  Top Layer w0.095: IC12B.3@121.725,18.556 122.067,18.556 122.183,18.673 122.318,18.673 122.338,18.653 122.71,18.653 122.766,18.597 122.766,18.559 123.008,18.316 R178B.1@123.028,18.316 123.048,18.316 123.291,18.559 123.291,18.597 123.347,18.653 123.517,18.653 123.647,18.523 v1(123.725,18.523) ; v1(200.925,81.531) 201.003,81.531 201.133,81.661 201.435,81.661 201.647,81.873 201.647,82.23 201.825,82.408 207.114,82.408 207.672,82.967 207.672,83.156 208.006,83.49 J11.H2@208.239,83.49
  Int2 (Sign) w0.102: v1(123.725,18.523) 123.777,18.523 123.934,18.679 124.155,18.679 124.34,18.864 124.34,19.235 125.357,20.252 125.484,20.252 127.232,21.999 127.232,22.843 177.464,73.075 177.464,76.939 179.95,79.425 191.078,79.425 192.528,80.875 195.611,80.875 196.436,81.7 200.055,81.7 200.068,81.688 200.716,81.688 200.873,81.531 v1(200.925,81.531)
SLOT2.LVDS_14_N: IC12B.10 J11.L2 R190B.2 | length 110.2
  Top Layer w0.095: IC12B.10@121.725,22.056 122.067,22.056 122.183,21.94 122.428,21.94 122.461,21.907 122.71,21.907 122.766,21.963 122.766,22.001 123.008,22.244 R190B.2@123.028,22.244 123.048,22.244 123.291,22.001 123.291,21.963 123.346,21.907 123.642,21.907 123.772,22.037 v1(123.85,22.037)
  Int2 (Sign) w0.102: v1(123.85,22.037) 123.902,22.037 124.059,21.881 124.192,21.881 127.386,25.075 127.386,28.436 179.236,80.286 186.906,80.286 187.32,80.7 190.575,80.7 191.675,81.8 195.248,81.8 196.098,82.65 196.275,82.65 200.577,82.65 200.65,82.723 201.2,82.723 201.273,82.65 202.792,82.65 203.232,83.09 203.232,83.174 203.172,83.233 203.166,83.233 202.909,83.49 J11.L2@202.639,83.49
SLOT2.LVDS_14_P: IC12B.9 J11.K2 R190B.1 | length 110.6
  Top Layer w0.095: IC12B.9@121.725,21.556 122.067,21.556 122.183,21.673 122.318,21.673 122.35,21.64 122.71,21.64 122.766,21.585 122.766,21.546 123.008,21.304 R190B.1@123.028,21.304 123.048,21.304 123.291,21.546 123.291,21.585 123.346,21.64 123.642,21.64 123.772,21.51 v1(123.85,21.51)
  Int2 (Sign) w0.102: v1(123.85,21.51) 123.902,21.51 124.059,21.667 124.28,21.667 127.6,24.986 127.6,28.347 179.325,80.072 186.995,80.072 187.409,80.486 190.664,80.486 191.764,81.586 195.336,81.586 196.186,82.436 200.665,82.436 200.738,82.509 201.112,82.509 201.185,82.436 202.881,82.436 203.446,83.001 203.446,83.174 203.505,83.233 203.512,83.233 203.769,83.49 J11.K2@204.039,83.49
SLOT2.LVDS_15_N: IC12B.14 J33.E5 R192B.2 | length 100.3
  Top Layer w0.095: IC12B.14@120.525,23.756 120.525,24.098 120.642,24.215 120.642,24.459 120.645,24.463 120.645,24.663 120.589,24.718 120.551,24.718 120.308,24.961 R192B.2@120.308,24.981 120.308,25.001 120.551,25.243 120.589,25.243 120.645,25.299 120.645,25.822 121.939,27.117 136.086,27.117 141.652,21.55 181.177,21.55 181.827,20.9 194.425,20.9 198.217,24.692 212.565,24.692 212.905,25.032 212.905,25.111 212.526,25.49 J33.E5@212.339,25.49
SLOT2.LVDS_15_P: IC12B.13 J33.D5 R192B.1 | length 100.3
  Top Layer w0.095: IC12B.13@121.025,23.756 121.025,24.098 120.908,24.215 120.908,24.349 120.912,24.352 120.912,24.663 120.968,24.718 121.006,24.718 121.248,24.961 R192B.1@121.248,24.981 121.248,25.001 121.006,25.243 120.968,25.243 120.912,25.299 120.912,25.712 122.05,26.85 135.975,26.85 141.542,21.283 181.067,21.283 181.717,20.633 194.536,20.633 198.327,24.425 212.676,24.425 213.172,24.921 213.172,25.111 213.552,25.49 J33.D5@213.739,25.49
SLOT2.LVDSr0_N: IC6.T23 R82.1 | length 8.3
  Top Layer w0.095: v1(73.515,37.184) IC6.T23@73.915,37.584
  Bottom Layer w0.095: v1(73.515,37.184) 73.548,37.184 74.091,36.641 74.091,36.109 73.507,35.525 73.467,35.485 73.467,35.213 ccw(c73.614,35.213) 73.614,35.065 73.791,35.065 cw(c73.791,34.918) 73.791,34.77 73.614,34.77 ccw(c73.614,34.623) 73.614,34.475 73.791,34.475 cw(c73.791,34.328) 73.791,34.18 73.614,34.18 ccw(c73.614,34.033) 73.614,33.885 73.791,33.885 cw(c73.791,33.738) 73.791,33.59 73.614,33.59 ccw(c73.614,33.443) 73.467,33.443 73.467,33.1 73.467,32.985 73.691,32.761 73.691,32.495 73.747,32.44 73.778,32.44 73.94,32.277 R82.1@73.94,32.257
SLOT2.LVDSr0_P: IC6.R21 R74.1 | length 8.7
  Top Layer w0.095: v1@74.368,38.837 v1(74.315,38.837) 74.662,39.184 IC6.R21@74.715,39.184
  Bottom Layer w0.095: R74.1@73.153,32.282 73.153,32.302 73.315,32.465 73.369,32.465 73.424,32.521 73.424,32.65 73.2,32.874 73.2,35.595 73.825,36.22 73.825,36.53 73.605,36.749 73.42,36.749 73.14,37.029 73.14,37.339 73.401,37.6 73.655,37.6 73.915,37.861 73.915,38.385 74.315,38.784 v1(74.315,38.837)
SLOT2.LVDSr1_N: IC6.L26 R56.1 | length 3.4
  Top Layer w0.095: IC6.L26@77.915,35.184 78.182,34.917 78.182,33.333 78.683,32.831 78.683,32.523 78.628,32.467 78.585,32.467 78.423,32.304 R56.1@78.423,32.284
SLOT2.LVDSr1_P: IC6.K26 R51.1 | length 3.4
  Top Layer w0.095: IC6.K26@78.715,35.184 78.448,34.917 78.448,33.443 78.95,32.941 78.95,32.523 79.006,32.467 79.048,32.467 79.21,32.304 R51.1@79.21,32.284
SLOT2.LVDSr3_N: IC6.C24 R249.1 | length 6.2
  Top Layer w0.095: IC6.C24@84.315,36.784 IC6.C24@84.315,36.789 ; IC6.C24@84.316,36.79 v1(84.716,37.19)
  Bottom Layer w0.095: v1(84.716,37.19) 84.716,37.482 85.192,37.482 85.29,37.384 85.834,37.384 87.608,39.159 88.362,39.159 88.682,38.839 88.723,38.839 88.836,38.726 88.836,38.691 88.998,38.529 R249.1@89.018,38.529
SLOT2.LVDSr3_P: IC6.C23 R247.1 | length 6.1
  Top Layer w0.095: IC6.C23@84.315,37.584 84.315,37.639 v1(84.716,38.04)
  Bottom Layer w0.095: v1(84.716,38.04) 84.716,37.748 85.303,37.748 85.401,37.65 85.711,37.65 85.809,37.748 85.821,37.748 87.498,39.425 88.473,39.425 88.701,39.197 88.914,39.197 R247.1@89.018,39.301
SLOT3.LVDS_0_N: J29.I2 R104.1 R107.2 | length 141.2
  Layer 1 w0.102: v1(199.875,35.795) 199.956,35.795 200.112,35.639 201.036,35.639 202,34.675 207.053,34.675 207.432,35.054 207.432,35.138 207.08,35.49 J29.I2@206.839,35.49
  Bottom Layer w0.095: R104.1@75.438,30.795 R104.1@75.418,30.795 ; R107.2@75.514,31.597 75.514,31.577 75.352,31.415 75.33,31.415 75.241,31.326 75.241,31.013 75.255,30.999 75.255,30.958 R104.1@75.418,30.795 ; v1(199.875,35.795) 199.797,35.795 199.667,35.665 197.588,35.665 197.089,35.167 114.506,35.167 113.531,34.192 98.264,34.192 94.1,30.027 94.1,28.875 92.192,26.967 79.308,26.967 77.95,28.325 76.75,28.325 75.241,29.834 75.241,30.577 75.255,30.591 75.255,30.633 R104.1@75.418,30.795
SLOT3.LVDS_0_P: J29.H2 R103.2 R104.2 | length 142
  Layer 1 w0.102: v1(199.875,35.268) 199.956,35.268 200.112,35.425 200.947,35.425 201.911,34.461 207.142,34.461 207.646,34.965 207.646,35.138 207.998,35.49 J29.H2@208.239,35.49
  Bottom Layer w0.095: R104.2@74.778,30.795 R104.2@74.798,30.795 ; R103.2@74.778,31.622 74.778,31.602 74.974,31.406 74.974,31.013 74.96,30.999 74.96,30.958 R104.2@74.798,30.795 ; v1(199.875,35.268) 199.797,35.268 199.667,35.399 197.699,35.399 197.2,34.9 114.617,34.9 113.642,33.925 98.375,33.925 94.367,29.917 94.367,28.764 92.302,26.7 79.198,26.7 77.839,28.058 76.639,28.058 74.974,29.723 74.974,30.577 74.96,30.591 74.96,30.633 R104.2@74.798,30.795
SLOT3.LVDS_1_N: J29.L2 R23.1 R26.2 | length 132.3
  Top Layer w0.095: R26.2@80.67,31.33 80.67,31.31 80.833,31.147 80.888,31.147 80.943,31.091 80.943,30.851 80.97,30.824 80.97,30.732 80.955,30.718 80.955,30.676 R23.1@80.793,30.514 ; R23.1@80.773,30.514 R23.1@80.793,30.514 ; v1(191.077,37.484) 191.077,37.409 190.943,37.276 190.943,37.097 190.571,36.725 178.075,36.725 176.649,35.299 111.151,35.299 107.66,31.808 101.933,31.808 99.3,29.175 97.902,29.175 96.866,28.138 95.541,28.138 95.011,27.608 92.435,27.608 91.76,26.933 87.789,26.933 85.639,29.083 81.937,29.083 80.97,30.051 80.97,30.296 80.955,30.31 80.955,30.351 R23.1@80.793,30.514
  Int2 (Sign) w0.102: v1(191.077,37.484) 191.077,37.441 190.911,37.275 190.911,37.125 191.032,37.004 191.032,36.793 192.286,35.539 198.011,35.539 198.8,34.75 202.928,34.75 203.232,35.054 203.232,35.138 202.88,35.49 J29.L2@202.639,35.49
SLOT3.LVDS_1_P: J29.K2 R22.2 R23.2 | length 132.2
  Top Layer w0.095: R23.2@81.433,30.514 R23.2@81.413,30.514 ; R22.2@81.483,31.33 81.483,31.31 81.321,31.147 81.266,31.147 81.21,31.091 81.21,30.961 81.236,30.935 81.236,30.732 81.25,30.718 81.25,30.676 R23.2@81.413,30.514 ; v1(190.55,37.5) 190.55,37.419 190.677,37.292 190.677,37.208 190.461,36.992 177.965,36.992 176.538,35.565 111.04,35.565 107.55,32.075 101.823,32.075 99.189,29.442 97.792,29.442 96.755,28.405 95.43,28.405 94.9,27.875 92.325,27.875 91.65,27.2 87.9,27.2 85.75,29.35 82.048,29.35 81.236,30.161 81.236,30.296 81.25,30.31 81.25,30.351 R23.2@81.413,30.514
  Int2 (Sign) w0.102: v1(190.55,37.5) 190.55,37.438 190.697,37.291 190.697,37.037 190.818,36.916 190.818,36.704 192.197,35.325 197.922,35.325 198.711,34.536 203.017,34.536 203.446,34.965 203.446,35.138 203.798,35.49 J29.K2@204.039,35.49
SLOT3.LVDS_2_N: IC6.J23 J33.I8 | length 140.6
  Top Layer w0.095: IC6.J23@79.49,37.584 v1(79.89,37.184)
  Layer 1 w0.102: v1(79.89,37.184) 79.899,37.184 80.099,37.383 80.567,37.383 80.875,37.075 80.875,36.758 81.175,36.458 81.175,32.35 85.871,27.654 95.404,27.654 95.827,28.078 96.156,28.078 96.216,28.018 96.216,27.805 96.021,27.61 v1(96.021,27.529) ; v1(196.05,32.145) 196.05,32.139 196.2,31.989 196.686,31.989 197.582,31.093 199.125,29.55 200.347,29.55 201.322,30.525 206.903,30.525 207.432,31.054 207.432,31.138 207.08,31.49 J33.I8@206.839,31.49
  Bottom Layer w0.095: v1(96.021,27.529) 96.021,27.594 96.164,27.738 96.164,28.266 96.959,29.06 99.224,31.326 181.899,31.326 182.588,32.015 190.722,32.015 190.742,32.036 193.418,32.036 193.439,32.015 195.842,32.015 195.972,32.145 v1(196.05,32.145)
SLOT3.LVDS_2_P: IC6.K22 J33.H8 | length 141.7
  Top Layer w0.095: IC6.K22@78.69,38.384 v1(79.09,37.984)
  Layer 1 w0.102: v1(79.09,37.984) 79.497,37.577 79.989,37.577 80.01,37.597 80.655,37.597 81.089,37.164 81.089,36.847 81.389,36.547 81.389,32.439 85.959,27.868 95.315,27.868 95.738,28.292 96.245,28.292 96.575,27.962 v1(96.575,27.55) ; v1(196.05,31.618) 196.05,31.625 196.2,31.775 196.597,31.775 197.369,31.004 199.036,29.336 200.436,29.336 201.411,30.311 206.992,30.311 207.646,30.965 207.646,31.138 207.998,31.49 J33.H8@208.239,31.49
  Bottom Layer w0.095: v1(96.575,27.55) 96.575,27.614 96.431,27.758 96.431,28.156 97.225,28.95 99.335,31.059 182.009,31.059 182.699,31.749 190.833,31.749 190.853,31.769 193.308,31.769 193.328,31.749 195.842,31.749 195.972,31.618 v1(196.05,31.618)
SLOT3.LVDS_3_N: J29.C6 R134.1 R144.2 | length 139.3
  Bottom Layer w0.095: R144.2@86.901,50.492 86.921,50.492 87.083,50.329 87.083,50.297 87.161,50.219 87.469,50.219 87.483,50.234 87.525,50.234 R134.1@87.687,50.396 ; R134.1@87.687,50.416 R134.1@87.687,50.396 ; J29.C6@215.239,43.49 215.426,43.49 215.805,43.111 215.805,43.032 215.448,42.675 199.525,42.675 198.408,43.792 195.008,43.792 192.083,46.717 154.064,46.717 153.689,46.342 140.839,46.342 138.139,43.642 107.44,43.642 106.264,42.467 92.708,42.467 89.9,45.275 89.9,49.477 89.411,49.967 89.152,50.225 88.525,50.225 88.52,50.219 87.905,50.219 87.891,50.234 87.85,50.234 R134.1@87.687,50.396
SLOT3.LVDS_3_P: J29.B6 R133.2 R134.2 | length 139.7
  Bottom Layer w0.095: R133.2@86.899,49.725 86.919,49.725 87.081,49.888 87.081,49.897 87.137,49.953 87.469,49.953 87.483,49.939 87.525,49.939 R134.2@87.687,49.776 ; R134.2@87.687,49.756 R134.2@87.687,49.776 ; J29.B6@216.639,43.49 216.452,43.49 216.072,43.111 216.072,42.921 215.559,42.408 199.414,42.408 198.298,43.525 194.898,43.525 191.973,46.45 154.175,46.45 153.8,46.075 140.95,46.075 138.25,43.375 107.55,43.375 106.375,42.2 92.598,42.2 89.633,45.164 89.633,49.367 89.3,49.7 89.041,49.959 88.636,49.959 88.63,49.953 87.905,49.953 87.891,49.939 87.85,49.939 R134.2@87.687,49.776
SLOT3.LVDS_4_N: IC6.F26 J29.F6 | length 138.6
  Top Layer w0.095: IC6.F26@81.915,35.184 82.099,35.001 82.099,34.443 82.2,34.342 82.2,33.65 84.817,31.033 92.333,31.033 98.763,37.463 106.215,37.463 108.961,40.208 173.336,40.208 174.501,41.374 186.924,41.374 189.049,43.499 197.852,43.499 198.702,44.35 211.203,44.35 211.605,43.948 211.605,43.869 211.226,43.49 J29.F6@211.039,43.49
SLOT3.LVDS_4_P: IC6.F25 J29.E6 | length 139.5
  Top Layer w0.095: IC6.F25@81.915,35.984 81.963,35.936 81.963,35.676 82.365,35.274 82.365,34.554 82.467,34.452 82.467,33.761 84.927,31.3 92.223,31.3 98.652,37.73 106.105,37.73 108.85,40.475 173.225,40.475 174.391,41.641 186.813,41.641 188.939,43.766 197.741,43.766 198.592,44.617 211.314,44.617 211.872,44.058 211.872,43.869 212.252,43.49 J29.E6@212.439,43.49
SLOT3.LVDS_5_N: IC6.K6 J12.H1 | length 143.7
  Top Layer w0.095: IC6.K6@78.715,51.184 v1(79.115,51.584)
  Layer 1 w0.102: v1(79.115,51.584) 79.164,51.535 79.361,51.535 79.42,51.475 79.42,51.303 79.731,50.992 80.967,50.992 81.45,51.475 81.45,55.075 82.586,56.211 88.311,56.211 89.124,55.399 92.324,55.399 93.325,54.397 93.325,53.272 94.658,51.94 95.075,51.94 95.26,52.125 95.26,52.341 95.425,52.507 v1(95.425,52.55) ; v1(199.698,51.748) 199.7,51.746 199.7,51.525 200.524,50.701 205.149,50.701 205.497,51.05 207.248,51.05 207.636,51.438 208.116,51.438 208.732,52.054 208.732,52.138 208.38,52.49 J12.H1@208.139,52.49
  Bottom Layer w0.095: v1(95.425,52.55) 95.425,52.472 95.295,52.342 95.295,52.168 95.351,52.112 95.606,52.112 95.799,52.306 96.769,52.306 97.45,51.625 98.81,51.625 98.918,51.517 112.483,51.517 114.211,49.789 121.436,49.789 121.773,50.125 135.198,50.125 137.814,52.742 142.889,52.742 143.764,53.617 197.646,53.617 198.81,52.452 199.459,51.803 199.643,51.803 v1(199.698,51.748)
SLOT3.LVDS_5_P: IC6.J6 J12.G1 | length 143.7
  Top Layer w0.095: IC6.J6@79.54,51.184 v1(79.94,51.584)
  Layer 1 w0.102: v1(79.94,51.584) 79.891,51.535 79.694,51.535 79.634,51.475 79.634,51.391 79.819,51.206 80.879,51.206 81.236,51.564 81.236,55.164 82.497,56.425 88.4,56.425 89.213,55.612 92.413,55.612 93.539,54.486 93.539,53.361 94.746,52.154 94.986,52.154 95.046,52.213 95.046,52.356 94.898,52.503 v1(94.898,52.564) ; v1(199.326,51.376) 199.327,51.374 199.549,51.374 200.435,50.487 205.237,50.487 205.586,50.836 207.336,50.836 207.724,51.224 208.205,51.224 208.946,51.965 208.946,52.138 209.298,52.49 J12.G1@209.539,52.49
  Bottom Layer w0.095: v1(94.898,52.564) 94.898,52.486 95.028,52.356 95.028,52.058 95.24,51.846 95.717,51.846 95.91,52.039 96.659,52.039 97.339,51.358 98.699,51.358 98.807,51.25 112.373,51.25 114.101,49.522 121.547,49.522 121.883,49.858 135.308,49.858 137.925,52.475 143,52.475 143.875,53.35 197.535,53.35 198.699,52.186 199.27,51.615 199.27,51.431 v1(199.326,51.376)
SLOT3.LVDS_6_N: IC6.C1 J12.K1 | length 127.7
  Top Layer w0.095: IC6.C1@84.315,55.184 84.499,55.367 84.499,55.69 85.426,56.617 92.061,56.617 93.775,54.902 94.223,54.902 94.465,54.66 94.649,54.66 v1(94.705,54.605)
  Layer 1 w0.102: v1(201.125,52.025) 201.162,51.988 201.162,51.767 201.354,51.575 204.372,51.575 204.532,51.734 204.532,51.897 J12.K1@203.939,52.49
  Bottom Layer w0.095: v1(94.705,54.605) 94.76,54.549 94.76,54.365 94.963,54.162 95.225,53.9 96.848,53.9 97.223,54.275 104.077,54.275 104.714,53.639 105.179,53.639 105.799,53.018 ; 105.799,53.017 105.929,52.887 106.175,52.642 113.333,52.642 114.976,50.999 121.203,50.999 121.371,51.167 134.039,51.167 134.764,51.892 135.814,51.892 137.573,53.65 141.898,53.65 142.923,54.675 198.291,54.675 200.237,52.729 200.886,52.08 201.07,52.08 v1(201.125,52.025)
SLOT3.LVDS_6_P: IC6.C2 J12.J1 | length 128.5
  Top Layer w0.095: IC6.C2@84.315,54.384 84.315,54.69 84.765,55.14 84.765,55.579 85.536,56.35 91.95,56.35 93.664,54.636 94.112,54.636 94.277,54.471 94.277,54.287 v1(94.332,54.232)
  Layer 1 w0.102: v1(200.752,51.652) 200.789,51.615 201.011,51.615 201.265,51.361 204.461,51.361 204.746,51.646 204.746,51.897 J12.J1@205.339,52.49
  Bottom Layer w0.095: v1(94.332,54.232) 94.387,54.177 94.571,54.177 94.696,54.051 95.115,53.633 96.958,53.633 97.333,54.008 103.967,54.008 104.603,53.372 105.068,53.372 105.533,52.908 ; 105.533,52.907 105.662,52.777 106.064,52.375 113.223,52.375 114.866,50.732 121.313,50.732 121.481,50.9 134.15,50.9 134.875,51.625 135.925,51.625 137.683,53.383 142.008,53.383 143.033,54.408 198.18,54.408 200.126,52.463 200.697,51.892 200.697,51.708 v1(200.752,51.652)
SLOT3.LVDS_7_N: IC6.J4 J12.C2 | length 147.3
  Top Layer w0.095: v1(79.085,52.391) IC6.J4@79.485,52.791
  Layer 1 w0.102: v1(79.085,52.391) 79.456,52.762 80.096,52.762 80.369,53.035 80.369,55.472 80.549,55.651 80.585,55.687 ccw(c80.459,55.813) 80.585,55.939 80.503,56.02 cw(c80.629,56.146) 80.503,56.272 cw(c80.629,56.146) 80.754,56.272 80.836,56.19 ccw(c80.962,56.316) 81.088,56.19 81.311,56.414 82.122,57.225 88.853,57.225 89.528,56.55 93.203,56.55 93.892,55.861 94.066,55.686 94.288,55.686 v1(94.324,55.649)
  Bottom Layer w0.095: v1(94.324,55.649) 94.38,55.594 94.38,55.41 94.515,55.275 104.027,55.275 104.986,54.317 107.983,54.317 108.606,53.694 108.641,53.694 108.767,53.567 115.458,53.567 116.025,53 117.648,53 117.865,53.217 127.658,53.217 128.361,52.514 129.686,52.514 130.152,52.979 130.7,52.979 130.704,52.975 134.398,52.975 136.015,54.592 141.439,54.592 142.665,55.817 199.958,55.817 201.06,54.715 201.093,54.682 ccw(c201.217,54.805) 201.34,54.682 201.351,54.693 cw(c201.474,54.57) 201.598,54.693 cw(c201.474,54.57) 201.598,54.446 201.587,54.435 ccw(c201.71,54.312) 201.587,54.188 201.754,54.021 201.788,53.987 202.125,53.65 215.423,53.65 215.805,54.032 215.805,54.111 215.426,54.49 J12.C2@215.239,54.49
SLOT3.LVDS_7_P: IC6.K5 J12.B2 | length 148
  Top Layer w0.095: v1(78.275,51.575) 78.306,51.575 IC6.K5@78.715,51.984
  Layer 1 w0.102: v1(78.275,51.575) 78.706,52.006 80.071,52.006 80.293,52.228 80.293,52.54 80.277,52.556 80.277,52.64 80.583,52.946 80.583,55.383 82.211,57.011 88.764,57.011 89.439,56.336 93.114,56.336 93.803,55.647 93.915,55.535 93.915,55.314 v1(93.952,55.277)
  Bottom Layer w0.095: v1(93.952,55.277) 94.007,55.222 94.191,55.222 94.404,55.008 103.917,55.008 104.875,54.05 107.873,54.05 108.496,53.427 108.53,53.427 108.657,53.3 115.348,53.3 115.914,52.733 117.758,52.733 117.975,52.95 127.548,52.95 128.251,52.247 129.797,52.247 130.262,52.712 130.589,52.712 130.593,52.708 134.508,52.708 136.125,54.325 141.55,54.325 142.775,55.55 199.848,55.55 202.014,53.383 215.534,53.383 216.072,53.921 216.072,54.111 216.452,54.49 J12.B2@216.639,54.49
SLOT3.LVDS_8_N: IC7C.48 J12.F2 R166C.2 | length 82.4
  Top Layer w0.095: IC7C.48@133.694,53.396 133.694,53.055 133.577,52.938 133.577,52.768 133.601,52.744 133.601,52.499 133.657,52.444 133.696,52.444 133.938,52.201 R166C.2@133.938,52.181 133.938,52.161 133.696,51.919 133.657,51.919 133.601,51.863 133.601,51.729 133.955,51.375 140.5,51.375 142.341,53.216 197.384,53.216 197.786,52.814 201.322,52.814 202,53.492 205.492,53.492 205.6,53.6 211.173,53.6 211.605,54.032 211.605,54.111 211.226,54.49 J12.F2@211.039,54.49